# EAGLE board E4masda (EAGLE 7.6.0)
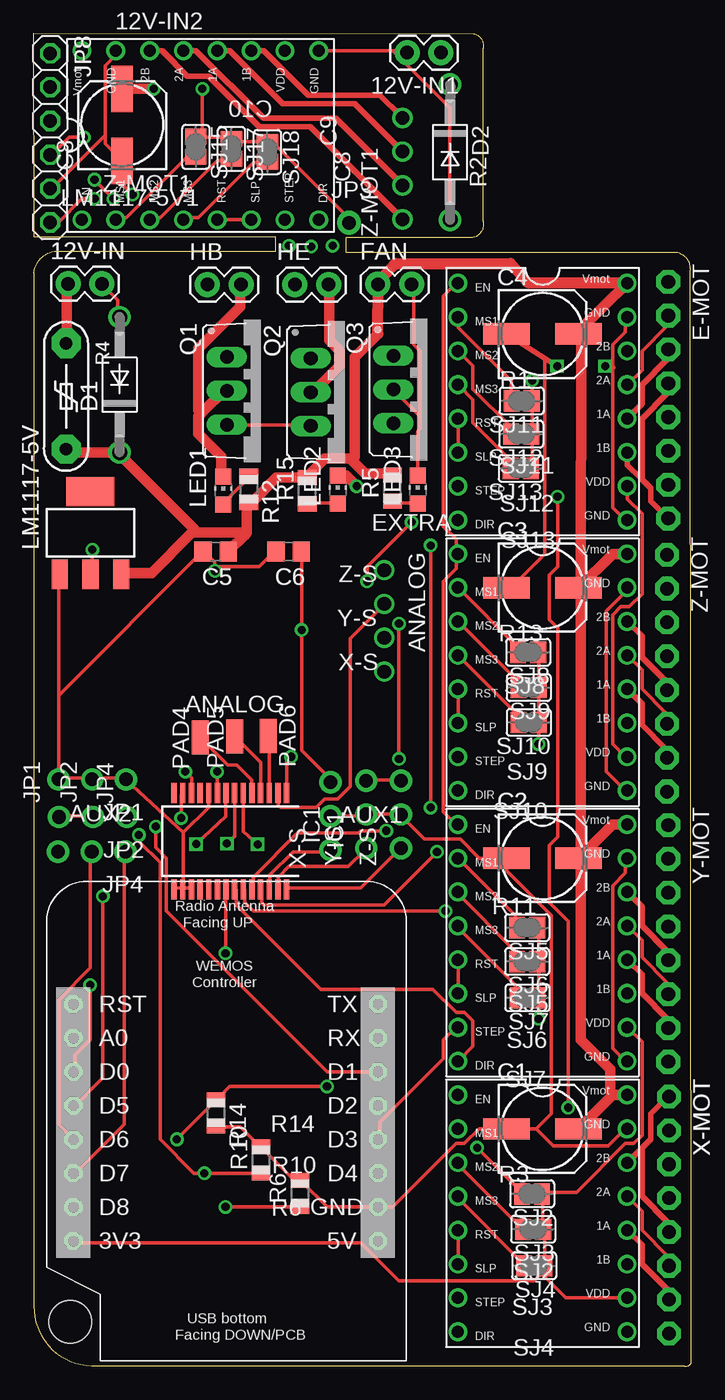
[diagram p0: board, top side]
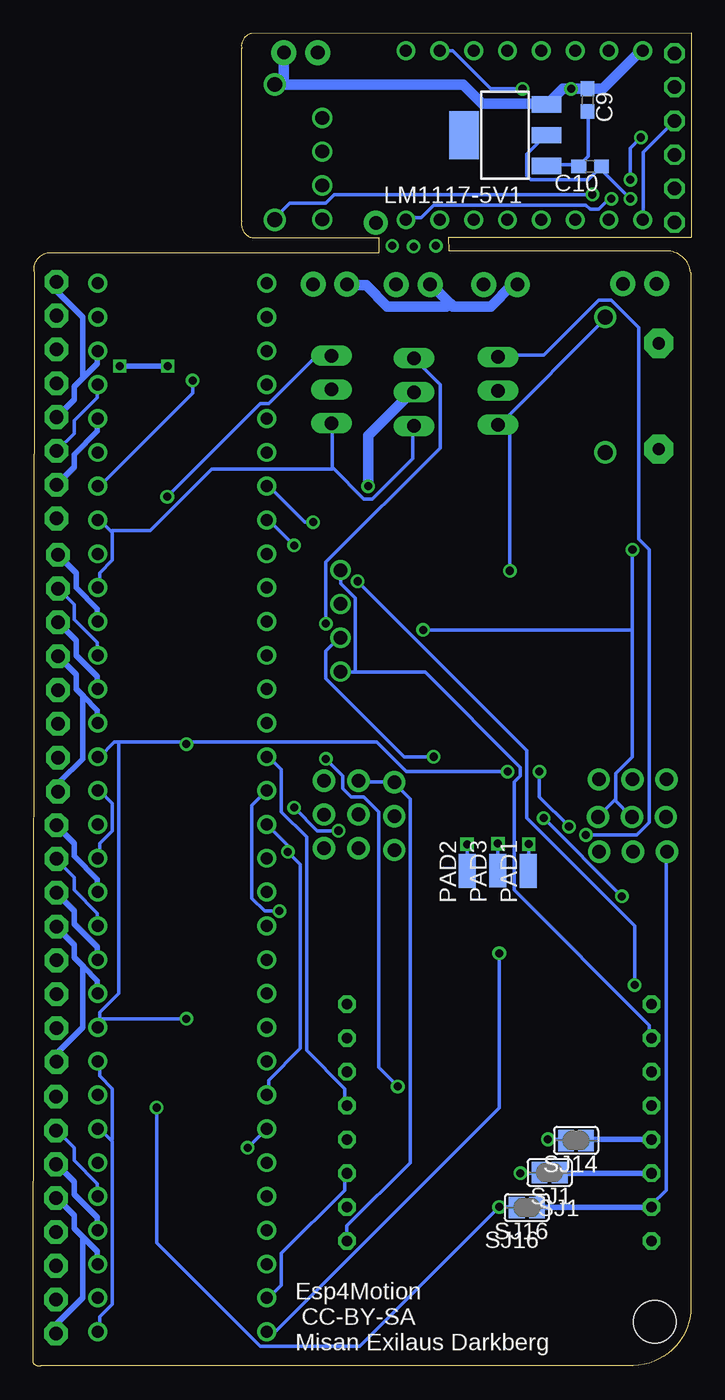
[diagram p1: board, bottom side, seen from below]

Size 49.41 x 100.11 mm. Coordinates in mm from the lower left corner, seen from the top.
Outline: 0,100.11 0.03,84.78 18.22,84.8 18.19,83.74 2.07,83.74 arc90 0.05,82.12 0.05,4.52 arc90 4.37,0.05 48.77,0.05 arc90 49.41,0.26 49.31,82.16 arc90 48.37,83.61 23.47,83.61 23.47,84.75 32.98,84.75 arc90 33.77,85.98 33.77,98.98 arc90 33.05,100.08 0.02,100.1
Copper layers (1*16): Top 0.035mm / dielectric 1.5mm / Bottom 0.035mm
Design rules "default *": minimum track width 10mil, minimum drill 24mil, track to track 8mil, track to pad 8mil, pad to pad 8mil, via to via 8mil, smd to smd 8mil, copper to edge 40mil, drill to drill 8mil, minimum pad ring 10mil, minimum via ring 8mil, stop-mask expansion 4mil, vias tented up to drill 0mil, thermal gap 10mil
Net classes: 1 Power: width 0.8 mm; 2 line: width 0.4 mm; 3 aux: width 0.2 mm
Holes 3.2 mm at 2.77,3.35

## Footprints (pad centres in the part's own frame; a part is rotated, then mirrored left to right if it is on the bottom)
1X02 = drill 1.016 pad 1.88: 1 0,0; 2 2.54,0
1X04 = drill 1.016: 1 -2.54,0; 2 0,0; 3 2.54,0; 4 5.08,0
153CLV-0605 = smd 3.5 x 1.6: + 2.7,0; - -2.7,0
C0805 = smd 1.3 x 1.5: 1 -0.95,0; 2 0.95,0
C0603 = smd 1.1 x 1: 1 -0.85,0; 2 0.85,0
DO41-10 = drill 1.118: A 5.08,0; C -5.08,0
1X08-CLEANBIG = drill 1.016 pad 1.778 octagon: 1 -8.89,0; 2 -6.35,0; 3 -3.81,0; 4 -1.27,0; 5 1.27,0; 6 3.81,0; 7 6.35,0; 8 8.89,0
SSOP28 = smd 0.4 x 1.5: 1 -4.225,-3.625; 2 -3.575,-3.625; 3 -2.925,-3.625; 4 -2.275,-3.625; 5 -1.625,-3.625; 6 -0.975,-3.625; 7 -0.325,-3.625; 8 0.325,-3.625; 9 0.975,-3.625; 10 1.625,-3.625; 11 2.275,-3.625; 12 2.925,-3.625; 13 3.575,-3.625; 14 4.225,-3.625; 15 4.225,3.625; 16 3.575,3.625; 17 2.925,3.625; 18 2.275,3.625; 19 1.625,3.625; 20 0.975,3.625; 21 0.325,3.625; 22 -0.325,3.625; 23 -0.975,3.625; 24 -1.625,3.625; 25 -2.275,3.625; 26 -2.925,3.625; 27 -3.575,3.625; 28 -4.225,3.625
1X03-CLEANBIG = drill 1.016 pad 1.676: 1 -2.54,0; 2 0,0; 3 2.54,0
1X01-CLEANBIG = drill 1.016 pad 1.778: 1 0,0
1X06 = drill 1.016 octagon: 1 -6.35,0; 2 -3.81,0; 3 -1.27,0; 4 1.27,0; 5 3.81,0; 6 6.35,0
CHIP-LED0805 = smd 1.2 x 1.2: A 0,-1.05; C 0,1.05
SOT223 = smd 1.219 x 2.235: 1 -2.311,-3.099; 2 0,-3.099; 3 2.311,-3.099 | smd 3.6 x 2.2: TAB 0,3.099
SMD1,27-2,54 = smd 1.27 x 2.54: 1 0,0
TO220BV = drill 1.016 long: D 0,-2.54; G -2.54,-2.54; S 2.54,-2.54
PF-8.0 = drill 0.914 pad 2.184 octagon: 1 -3.969,0; 2 3.969,0
R0805 = smd 1.1 x 1.4: 1 -1,0; 2 1,0
SJ = smd 1.168 x 1.6: 1 -0.762,0; 2 0.762,0
A4988BREAKOUT = drill 0.9: 1A 8.89,1.27; 1B 11.43,1.27; 2A 6.35,1.27; 2B 3.81,1.27; DIR 16.51,-11.43; EN -1.27,-11.43; GND 16.51,1.27; GND@0 1.27,1.27; MS1 1.27,-11.43; MS2 3.81,-11.43; MS3 6.35,-11.43; RST 8.89,-11.43; SLP 11.43,-11.43; STEP 13.97,-11.43; VDD 13.97,1.27; VMOT -1.27,1.27
WEMOS = drill 0.8 octagon: 3V3 0,0; 5V 22.86,0; A0 0,15.24; D0 0,12.7; D1 22.86,12.7; D2 22.86,10.16; D3 22.86,7.62; D4 22.86,5.08; D5 0,10.16; D6 0,7.62; D7 0,5.08; D8 0,2.54; GND 22.86,2.54; RST 0,17.78; RX 22.86,15.24; TX 22.86,17.78

## Placement (x,y rotation side)
12V-IN  [1X02]  2.61,81.29 0 top
12V-IN1  [1X02]  30.6,98.65 180 top
ANALOG  [1X04]  26.35,57.25 270 top
C1  100uf  [153CLV-0605]  38.23,17.83 0 top
C2  100uf  [153CLV-0605]  38.23,38.15 0 top
C3  100uf  [153CLV-0605]  38.23,58.47 0 top
C4  100uf  [153CLV-0605]  38.23,77.52 0 top
C5  10uf  [C0805]  13.69,61.18 180 top
C6  100uf  [C0805]  19.17,61.18 180 top
C8  100uf  [153CLV-0605]  6.67,93.21 90 top
C9  10uf  [C0603]  7.8,95.09 270 bottom
C10  100uf  [C0603]  7.62,90.11 180 bottom
D1  1N4004  [DO41-10]  6.48,73.71 90 top
D2  1N4004  [DO41-10]  31.29,91.18 270 top
E-MOT  [1X08-CLEANBIG]  47.67,72.55 270 top
FAN  [1X02]  25.87,81.25 0 top
HB  [1X02]  13.07,81.23 0 top
HE  [1X02]  19.63,81.23 0 top
IC1  MCP23017SS  [SSOP28]  14.79,39.43 180 top
JP1  [1X03-CLEANBIG]  4.42,44.07 180 top
JP2  [1X03-CLEANBIG]  4.47,41.25 180 top
JP3  [1X01-CLEANBIG]  23.7,85.88 0 top
JP4  [1X03-CLEANBIG]  4.39,38.65 180 top
JP8  [1X06]  1.27,92.25 270 top
LED1  [CHIP-LED0805]  14.27,65.75 0 top
LED2  [CHIP-LED0805]  22.87,65.85 0 top
LED3  [CHIP-LED0805]  28.87,65.85 0 top
LM1117-5V  LM1117IMPX-ADJ  [SOT223]  4.29,62.58 0 top
LM1117-5V1  LM1117IMPX-ADJ  [SOT223]  13.99,92.45 90 bottom
PAD1  WIREPADSMD1,27-254  [SMD1,27-2,54]  12.27,37.19 0 bottom
PAD2  WIREPADSMD1,27-254  [SMD1,27-2,54]  16.84,37.19 0 bottom
PAD3  WIREPADSMD1,27-254  [SMD1,27-2,54]  14.55,37.21 0 bottom
PAD4  WIREPADSMD1,27-254  [SMD1,27-2,54]  12.52,47.22 0 top
PAD5  WIREPADSMD1,27-254  [SMD1,27-2,54]  15.11,47.3 0 top
PAD6  WIREPADSMD1,27-254  [SMD1,27-2,54]  17.65,47.32 180 top
Q1  IRL540  [TO220BV]  17.07,73.25 270 top
Q2  IRL540  [TO220BV]  23.37,73.15 270 top
Q3  IRL540  [TO220BV]  29.57,73.35 270 top
R4  11  [PF-8.0]  2.46,72.85 270 top
R5  22R  [R0805]  26.97,65.95 90 top
R6  10k  [R0805]  20.03,12.98 90 top
R10  10k  [R0805]  17.11,15.5 90 top
R12  22R  [R0805]  16.17,65.85 270 top
R14  10k  [R0805]  13.71,19.02 270 top
R15  22R  [R0805]  20.57,65.75 90 top
SJ1  [SJ]  10.65,14.54 180 bottom
SJ2  [SJ]  37.44,12.94 180 top
SJ3  [SJ]  37.52,10.29 180 top
SJ4  [SJ]  37.6,7.54 180 top
SJ5  [SJ]  37.07,32.93 180 top
SJ6  [SJ]  37.07,30.39 180 top
SJ7  [SJ]  37.1,27.66 180 top
SJ8  [SJ]  37.15,53.62 180 top
SJ9  [SJ]  37.2,50.97 180 top
SJ10  [SJ]  37.2,48.35 180 top
SJ11  [SJ]  36.66,72.49 180 top
SJ12  [SJ]  36.63,70 180 top
SJ13  [SJ]  36.6,67.43 180 top
SJ14  [SJ]  8.67,16.95 180 bottom
SJ15  [SJ]  12.2,91.58 270 top
SJ16  [SJ]  12.36,11.91 180 bottom
SJ17  [SJ]  14.87,91.42 270 top
SJ18  [SJ]  17.58,91.19 270 top
U$1  A4988BREAKOUT  [A4988BREAKOUT]  43.31,19.1 270 top
U$2  A4988BREAKOUT  [A4988BREAKOUT]  43.31,80.06 270 top
U$3  A4988BREAKOUT  [A4988BREAKOUT]  43.31,39.42 270 top
U$5  WEMOS  [WEMOS]  3.01,9.41 0 top
U$6  A4988BREAKOUT  [A4988BREAKOUT]  4.92,97.52 0 top
U$9  A4988BREAKOUT  [A4988BREAKOUT]  43.31,59.74 270 top
X-MOT  [1X08-CLEANBIG]  47.72,11.35 270 top
X-S  [1X03-CLEANBIG]  22.31,41.31 90 top
Y-MOT  [1X08-CLEANBIG]  47.67,31.75 270 top
Y-S  [1X03-CLEANBIG]  24.99,41.44 90 top
Z-MOT  [1X08-CLEANBIG]  47.57,52.05 270 top
Z-MOT1  [1X04]  27.72,88.67 90 top
Z-S  [1X03-CLEANBIG]  27.6,41.44 90 top

## Library data of the parts
12V-IN 12V-IN1 FAN HB HE = SparkFun
ANALOG LED1-LED3 U$1-U$3 U$6 U$9 Z-MOT1 = RepRapjr
C1-C4 C8 = resistor
C5 C6 C9 C10 = eagle-ltspice; SPICEMODEL: NONE; SPICEPREFIX: C
D1 D2 = diode
E-MOT IC1 JP1-JP4 JP8 R5 R6 R10 R12 R14 R15 X-MOT X-S Y-MOT Y-S Z-MOT Z-S = adafruit
LM1117-5V LM1117-5V1 = lm1117
PAD1-PAD6 = wirepad
Q1-Q3 = smootietransistor-power
R4 = polyswitch
SJ1-SJ18 = jumper
U$5 = 1455413453956-wemos

## Nets
3V3: IC1.9 SJ2.1 SJ3.1 SJ4.1 SJ5.1 SJ6.1 SJ7.1 SJ8.1 SJ9.1 SJ10.1 SJ11.1 SJ12.1 SJ13.1 U$1.VDD U$2.VDD U$3.VDD U$5.3V3 U$9.VDD
3V31: JP3.1 SJ15.1 SJ17.1 SJ18.1 U$6.VDD
5V: C6.1 JP2.1 JP2.2 JP2.3 LM1117-5V.2 U$5.5V X-S.3 Y-S.3 Z-S.3
5V1: C10.1 JP8.6 LM1117-5V1.2
12V [Power]: C1.+ C2.+ C3.+ C4.+ C5.1 D1.C FAN.1 HB.1 HE.1 LM1117-5V.3 R4.2 R5.2 R12.2 R15.2 U$1.VMOT U$2.VMOT U$3.VMOT U$9.VMOT
12V1 [Power]: 12V-IN1.1 C8.+ C9.1 D2.C LM1117-5V1.3 U$6.VMOT
ANALOG: ANALOG.1 ANALOG.4 U$5.A0
AUX2 [aux]: IC1.8 PAD1.1
E-DIR: IC1.24 U$2.DIR
E-STEP: U$2.STEP U$5.D0
ENABLE: IC1.25 U$1.EN U$2.EN U$3.EN U$9.EN
ENABLE1: JP8.3 U$6.EN
FAN: JP4.3 SJ16.1 U$5.D8
GND: 12V-IN.2 C1.- C2.- C3.- C4.- C5.2 C6.2 D1.A IC1.10 IC1.15 IC1.16 IC1.17 JP1.1 JP1.2 JP1.3 LM1117-5V.1 Q1.S Q2.S Q3.S R6.2 R10.2 R14.2 U$1.GND U$1.GND@0 U$2.GND U$2.GND@0 U$3.GND U$3.GND@0 U$5.GND U$9.GND U$9.GND@0 X-S.2 Y-S.2 Z-S.2
GND1: 12V-IN1.2 C8.- D2.A JP8.5 U$6.GND U$6.GND@0
HB0: JP4.1 SJ1.1 U$5.D7
HE0: JP4.2 SJ14.1 U$5.D6
N$1: LED3.A R5.1
N$3 [aux]: IC1.7 PAD3.1
N$4: SJ12.2 U$2.MS2
N$5: U$2.RST U$2.SLP
N$6: SJ13.2 U$2.MS3
N$7: SJ11.2 U$2.MS1
N$8 [line]: U$3.1B Y-MOT.4 Y-MOT.8
N$9 [line]: U$3.1A Y-MOT.3 Y-MOT.7
N$10: U$3.2A Y-MOT.2 Y-MOT.6
N$11 [line]: U$3.2B Y-MOT.1 Y-MOT.5
N$12 [line]: U$1.1B X-MOT.4 X-MOT.8
N$13 [Power]: HB.2 LED1.C Q1.D
N$14 [line]: U$1.1A X-MOT.3 X-MOT.7
N$15: U$1.2A X-MOT.2 X-MOT.6
N$16 [line]: U$1.2B X-MOT.1 X-MOT.5
N$17 [line]: U$9.1B Z-MOT.4 Z-MOT.8
N$18: FAN.2 LED3.C Q3.D
N$19 [aux]: IC1.3 PAD6.1
N$20 [line]: U$9.1A Z-MOT.3 Z-MOT.7
N$21 [aux]: IC1.6 PAD2.1
N$22 [aux]: IC1.5 PAD4.1
N$23: Q2.G R14.1 SJ14.2
N$24: SJ3.2 U$1.MS2
N$25: U$9.RST U$9.SLP
N$26 [aux]: IC1.4 PAD5.1
N$27: Q3.G R6.1 SJ16.2
N$28: U$3.RST U$3.SLP
N$29: U$1.RST U$1.SLP
N$30 [Power]: 12V-IN.1 R4.1
N$34: SJ4.2 U$1.MS3
N$35: SJ2.2 U$1.MS1
N$37: SJ17.2 U$6.MS2
N$39: SJ18.2 U$6.MS3
N$40: SJ15.2 U$6.MS1
N$41 [line]: U$6.2B Z-MOT1.1
N$42 [line]: U$6.2A Z-MOT1.2
N$43 [line]: U$6.1A Z-MOT1.3
N$44 [line]: U$6.1B Z-MOT1.4
N$45: U$6.RST U$6.SLP
N$46: U$9.2A Z-MOT.2 Z-MOT.6
N$48 [line]: U$9.2B Z-MOT.1 Z-MOT.5
N$49: C9.2 C10.2 LM1117-5V1.1
N$50 [line]: E-MOT.4 E-MOT.8 U$2.1B
N$51 [line]: E-MOT.3 E-MOT.7 U$2.1A
N$54: LED1.A R12.1
N$55: E-MOT.2 E-MOT.6 U$2.2A
N$56: SJ6.2 U$3.MS2
N$57 [Power]: HE.2 LED2.C Q2.D
N$58: SJ7.2 U$3.MS3
N$59: SJ5.2 U$3.MS1
N$60 [line]: E-MOT.1 E-MOT.5 U$2.2B
N$64: SJ9.2 U$9.MS2
N$65: LED2.A R15.1
N$66: SJ10.2 U$9.MS3
N$67: SJ8.2 U$9.MS1
N$S4: Q1.G R10.1 SJ1.2
S-A0: ANALOG.3 IC1.1
S-A1: ANALOG.2 IC1.2
SCL: IC1.12 U$5.D1
SDA: IC1.13 U$5.D5
X-DIR: IC1.21 U$1.DIR
X-STEP: U$1.STEP U$5.D4
X-STOP: IC1.26 X-S.1
Y-DIR: IC1.22 U$3.DIR
Y-STEP: U$3.STEP U$5.D3
Y-STOP: IC1.27 Y-S.1
Z-DIR: IC1.23 U$9.DIR
Z-DIR1: JP8.4 U$6.DIR
Z-STEP: U$5.D2 U$9.STEP
Z-STEP1: U$6.STEP
Z-STOP: IC1.28 Z-S.1

## Tracks (layer width: path | path; a pad name or v marks a point on that pad's centre or on a via)
3V3  (via drill 0.61)
  Top 0.254: 44.42,5.05 U$1.VDD 39.99,5.13 38.25,6.88 SJ4.1 | SJ4.1 38.4,7.67 38.4,10.21 SJ3.1 38.25,10.37 38.25,12.91 SJ2.1 38.25,13.07 40.79,13.07 44.44,16.72 45.07,16.72 45.71,17.36 45.71,24.34 44.6,25.45 U$3.VDD | U$5.3V3 3.16,9.26 24.59,9.26 27.45,6.4 37.61,6.4 38.25,7.04 38.25,7.51 SJ4.1 | SJ8.1 37.93,53.55 37.93,51.01 SJ9.1 37.93,50.85 37.93,48.47 SJ10.1 37.93,48.31 v37.93,46.72 | SJ5.1 37.93,32.91 37.93,30.53 SJ6.1 37.93,30.37 37.93,27.67 SJ7.1 37.93,27.52 v37.93,26.09 | SJ13.1 37.45,67.52 37.45,69.9 SJ12.1 37.45,70.06 37.45,72.44 SJ11.1 37.45,72.6 v37.45,74.03 | v13.8,44.66 13.8,43.07 IC1.9 | U$2.VDD 44.6,66.09 44.6,65.14 45.71,64.03 45.71,58 44.75,57.04 44.12,57.04 43.48,56.41 43.48,46.72 44.44,45.77 U$9.VDD
  Bottom 0.254: v13.8,44.66 21.42,44.66 23.64,46.88 37.93,46.88 | 43.01,46.88 43.33,46.88 44.44,45.77 U$9.VDD | 43.01,46.88 37.93,46.88 | 44.44,26.09 44.44,26.56 43.01,27.99 43.01,46.88 | 44.44,26.09 44.44,25.45 U$3.VDD 44.44,26.09 | v37.45,74.03 37.45,73.08 44.44,66.09 U$2.VDD | 44.44,26.09 v37.93,26.09 | 37.93,46.88 v37.93,46.72
3V31  (via drill 0.61)
  Top 0.254: 12.69,92.29 14.75,92.29 SJ17.1 14.91,92.13 15.07,91.97 17.45,91.97 SJ18.1 17.61,91.81 18.08,91.81 23.64,86.25 23.64,85.94 JP3.1 | 12.69,92.29 12.21,92.29 SJ15.1 12.69,92.29 | 12.69,92.29 v12.69,95.94
  Bottom 0.254: v12.69,95.94 15.07,95.94 17.93,98.79 18.88,98.79 U$6.VDD
5V  (via drill 0.61)
  Top 0.254: v4.43,61.33 4.43,59.58 LM1117-5V.2 | JP2.3 2.05,41.33 4.43,41.33 JP2.2 | Z-S.3 27.45,44.03 25.07,44.03 Y-S.3 | C6.1 20.15,61.17 v20.15,55.3 20.15,46.25 22.21,44.18 22.21,43.87 X-S.3
  Bottom 0.254: 4.43,55.3 4.43,45.77 5.7,44.5 5.7,42.6 | 4.43,55.3 v4.43,61.33 | 5.7,42.6 5.7,42.44 4.59,41.33 JP2.2 | 5.7,42.6 6.97,41.33 JP2.1 | U$5.5V 25.86,10.53 21.1,15.29 21.1,42.6 22.21,43.71 X-S.3 22.37,43.87 24.91,43.87 Y-S.3 | v20.15,55.3 4.43,55.3
5V1  (via drill 0.61)
  Top 0.254: v4.59,87.68 3.64,87.68 1.89,85.94 1.42,85.94 JP8.6
  Bottom 0.254: LM1117-5V1.2 10.94,92.44 12.37,91.02 12.37,89.43 12.05,89.11 7.77,89.11 6.81,90.06 C10.1 6.81,89.9 v4.59,87.68
12V
  Top 0.8: R4.2 2.53,68.79 2.69,68.63 6.34,68.63 D1.C 6.65,68.31 12.05,62.92 11.89,62.6 | 15.78,62.36 14.75,61.33 C5.1 | 15.78,62.36 16.02,62.6 16.02,64.82 R12.2 16.5,64.98 18.24,66.73 20.47,66.73 R15.2 20.78,67.04 21.89,68.16 23.8,68.16 23.88,68.08 | 23.88,68.08 24.91,67.04 26.82,67.04 R5.2 | 11.89,62.6 8.88,59.58 6.65,59.58 LM1117-5V.3 | 11.89,62.6 15.54,62.6 15.78,62.36 | FAN.1 25.86,81.17 25.86,77.52 24.12,75.78 24.12,68.31 23.88,68.08 | U$2.VMOT 44.44,81.33 44.44,81.01 44.64,81.37 40.84,77.65 C4.+ 41.15,76.92 41.1,59.11 C3.+ | U$9.VMOT 43.48,61.01 40.94,58.47 C3.+ | 43.48,20.37 U$1.VMOT | 43.48,20.37 40.94,17.83 C1.+ | U$3.VMOT 43.48,40.69 40.94,38.15 C2.+ | 43.48,20.37 43.33,20.69 43.33,22.28 41.1,24.5 41.1,37.83 C2.+ | C3.+ 41.1,58.15 41.1,38.79 C2.+
  Top 0.813: 25.86,77.52 25.91,81.36 27.18,82.8 35.81,82.8 37.11,81.38 44.64,81.37
  Bottom 0.8: 18.16,79.82 19.51,81.17 HE.1 | 18.16,79.82 17.93,79.59 15.07,79.59 13.48,81.17 13.16,81.17 HB.1 | FAN.1 25.86,81.17 24.43,81.17 22.85,79.59 18.4,79.59 18.16,79.82
12V1  (via drill 0.61)
  Top 0.8: v9.04,95.94 6.81,95.94 C8.+
  Bottom 0.8: 7.92,95.94 v9.04,95.94 9.67,95.94 10.78,94.83 LM1117-5V1.3 11.26,94.83 15.7,94.83 17.13,96.25 31.26,96.25 D2.C 30.63,96.57 30.63,98.64 12V-IN1.1 | 7.92,95.94 6.65,95.94 4.11,98.48 U$6.VMOT | 7.92,95.94 C9.1
ANALOG
  Bottom 0.254: 25.23,52.12 26.34,52.12 ANALOG.4 | 25.23,52.12 19.99,52.12 12.85,44.98 12.85,44.34 13.32,43.87 13.32,35.77 3.16,25.61 3.16,24.66 U$5.A0 | 25.23,52.12 25.23,57.68 26.34,58.79 26.34,59.74 ANALOG.1
AUX2  (via drill 0.6)
  Top 0.254: IC1.8 14.47,41.29 v12.22,39.22
  Bottom 0.254: v12.22,39.22 12.24,37.21 PAD1.1
E-DIR  (via drill 0.61)
  Top 0.254: v26.5,40.22 24.59,40.22 24.43,40.06 19.83,40.06 16.5,36.72 16.5,35.93 IC1.24 | v29.83,61.65 v29.83,41.96
  Bottom 0.254: v26.5,40.22 28.09,40.22 v29.83,41.96 | v29.83,61.65 31.74,63.55 U$2.DIR
E-STEP  (via drill 0.61)
  Top 0.254: v4.27,28.63 4.27,24.5 3.16,23.39 3.16,22.12 U$5.D0 | v25.07,58.95 25.07,60.06 v28.4,63.39
  Bottom 0.254: v4.27,28.63 4.27,33.07 12.37,41.17 12.37,46.25 v25.07,58.95 | v28.4,63.39 29.04,63.39 31.74,66.09 U$2.STEP
ENABLE  (via drill 0.61)
  Top 0.254: 31.74,61.01 31.74,62.12 30.78,63.08 30.78,80.38 31.74,81.33 U$2.EN | v30.31,38.63 26.34,34.66 17.29,34.66 17.13,34.82 17.13,35.77 IC1.25 | 31.74,61.01 31.74,59.9 30.78,58.95 30.78,41.64 31.74,40.69 U$3.EN | 31.74,61.01 U$9.EN
  Bottom 0.254: U$3.EN 31.9,40.69 30.31,39.1 v30.31,38.63 29.36,37.68 29.36,23.86 31.74,21.48 31.74,20.37 U$1.EN
ENABLE1
  Bottom 0.254: U$6.EN 3.64,86.25 3.64,91.17 1.42,93.4 JP8.3
FAN
  Bottom 0.254: JP4.3 1.89,38.63 1.89,13.23 3,12.12 U$5.D8
  Bottom 0.406: U$5.D8 11.56,11.95 SJ16.1
GND  (via drill 0.6, 0.61)
  Top 0.254: 44.67,2.8 U$1.GND | IC1.15 10.62,35.93 11.1,35.93 IC1.16 11.26,35.93 | 11.26,35.93 11.73,35.93 IC1.17 | 11.26,40.09 11.26,39.58 11.26,35.93 | 11.26,40.09 13.19,41.97 13.16,42.91 IC1.10 | 13.72,60.14 13.8,60.06 16.97,60.06 18.08,61.17 C6.2 | 13.72,60.14 13.64,60.22 13.64,60.38 12.85,61.17 C5.2 12.69,61.17 1.89,50.38 | 1.89,44.18 1.89,50.38 | 1.89,50.38 1.89,59.42 LM1117-5V.1 | 1.89,44.18 4.27,44.18 JP1.2 4.43,44.18 6.81,44.18 JP1.1 6.97,44.03 11.26,40.09 | 1.89,44.18 JP1.3 | D1.A 6.34,78.79 6.34,80.06 5.23,81.17 12V-IN.2 | Q1.S 14.59,70.7 20.78,70.7 Q2.S | U$2.GND@0 44.44,78.79 44.44,77.68 43.48,76.73 43.48,75.01 43.48,64.5 44.44,63.55 U$2.GND | X-S.2 22.37,41.33 24.91,41.33 Y-S.2 25.07,41.49 27.45,41.49 Z-S.2 27.61,41.33 29.36,39.58 32.05,39.58 33.48,38.15 C2.- 35.55,38.15 35.55,37.2 38.88,33.87 38.88,18.94 37.77,17.83 | R14.2 13.8,17.99 15.54,17.99 16.97,16.56 R10.2 17.13,16.4 19.51,14.02 19.99,14.02 R6.2 20.15,13.86 22.05,11.96 U$5.GND 26.02,11.96 26.97,11.96 31.74,16.72 32.37,16.72 33.48,17.83 C1.- 37.77,17.83 | 37.77,17.83 39.04,16.56 43.17,16.56 44.44,17.83 U$1.GND@0 | U$3.GND@0 44.44,38.15 44.44,37.04 43.48,36.09 43.48,23.86 44.44,22.91 U$3.GND | U$9.GND@0 44.44,58.47 44.44,58.15 43.01,56.73 43.01,44.66 44.44,43.23 U$9.GND | v13.64,59.74 13.64,60.06 13.72,60.14 | C3.- 35.86,58.47 38.4,61.01 38.4,75.62 38.44,75.67
  Top 0.406: C4.- 38.44,75.67 v39.32,75.11 | v42.93,75.11 43.48,75.01
  Bottom 0.254: 26.9,67.44 24.59,65.14 23.96,65.14 20.94,68.16 20.94,70.54 Q2.S | 26.9,67.44 26.97,67.52 26.97,70.7 Q3.S | D1.A 6.5,78.63 14.43,70.7 Q1.S 13.64,71.33 v13.64,59.74 | 43.56,62.68 44.44,63.55 U$2.GND | 43.56,62.68 43.48,62.6 43.48,60.54 44.44,59.58 44.44,58.47 U$9.GND@0 | U$3.GND@0 44.44,38.15 44.44,39.26 43.48,40.22 43.48,42.28 44.44,43.23 U$9.GND | 43.56,16.96 44.44,17.83 U$1.GND@0 | 43.56,16.96 43.48,16.88 43.48,4.66 44.44,3.7 44.44,2.59 U$1.GND | U$3.GND 44.44,22.91 44.44,21.8 43.48,20.85 43.48,17.04 43.56,16.96 | 26.9,67.44 26.97,67.36 36.02,67.36 40.63,62.76 43.48,62.76 43.56,62.68
  Bottom 0.406: v39.32,75.11 v42.93,75.11
GND1  (via drill 0.61)
  Top 0.254: 5.38,92.44 5.38,91.81 6.65,90.54 C8.- 6.81,90.38 6.81,88.63 v7.45,88 | 5.38,92.44 5.38,97.68 6.18,98.48 6.18,98.79 U$6.GND@0 | 5.38,92.44 1.42,88.48 JP8.5 | 26.97,98.79 27.93,98.79 12V-IN1.2 | 26.97,98.79 21.58,98.79 U$6.GND | 26.97,98.79 31.26,94.51 31.26,86.25 D2.A
  Bottom 0.254: v7.45,88 26.82,88 27.45,87.36 30.15,87.36 31.26,86.25 D2.A
HB0
  Top 0.254: JP4.1 6.81,38.63 6.81,18.15 3.16,14.5 U$5.D7
  Bottom 0.406: U$5.D7 9.84,14.49 SJ1.1
HE0
  Top 0.254: U$5.D6 1.89,18.15 1.89,27.52 4.27,29.9 4.27,38.63 JP4.2
  Bottom 0.406: U$5.D6 7.83,17.03 SJ14.1
N$1
  Top 0.254: LED3.A 28.72,64.82 26.97,64.82 R5.1
N$3  (via drill 0.6)
  Top 0.254: IC1.7 15.12,39.78 v14.53,39.24
  Bottom 0.254: v14.53,39.24 14.53,37.24 PAD3.1
N$4
  Top 0.254: SJ12.2 35.86,70.06 35.86,70.54 33.01,73.39 33.01,75.14 31.9,76.25 U$2.MS2
N$5
  Top 0.254: U$2.SLP 31.9,68.63 31.9,71.17 U$2.RST
N$6
  Top 0.254: SJ13.2 35.71,67.52 35.71,68.16 33.01,70.85 33.01,72.6 31.9,73.71 U$2.MS3
N$7
  Top 0.254: SJ11.2 35.86,72.6 35.86,74.03 31.9,78 31.9,78.79 U$2.MS1
N$8
  Bottom 0.4: 45.63,29.98 46.34,30.69 46.34,31.64 47.61,32.91 Y-MOT.4 | 45.63,29.98 44.6,28.94 44.6,27.99 U$3.1B | Y-MOT.8 47.61,22.91 47.61,23.55 45.71,25.45 45.71,29.9 45.63,29.98
N$9
  Top 0.4: Y-MOT.7 47.61,25.45 47.61,26.09 45.71,27.99 45.71,29.42 44.6,30.53 U$3.1A
  Bottom 0.4: U$3.1A 44.6,30.53 44.6,31.48 46.34,33.23 46.34,34.18 47.61,35.45 Y-MOT.3
N$10
  Top 0.254: Y-MOT.6 47.61,27.99 47.61,28.79 45.71,30.69 45.71,31.96 44.6,33.07 U$3.2A
  Bottom 0.254: U$3.2A 44.6,33.07 44.6,34.02 46.34,35.77 46.34,36.72 47.61,37.99 Y-MOT.2
N$11
  Top 0.4: Y-MOT.5 47.61,30.53 47.61,31.17 45.71,33.07 45.71,34.5 44.6,35.61 U$3.2B
  Bottom 0.4: U$3.2B 44.6,35.61 44.6,36.56 46.34,38.31 46.34,39.26 47.61,40.53 Y-MOT.1
N$12
  Bottom 0.4: 45.63,9.66 46.34,10.37 46.34,11.32 47.61,12.59 X-MOT.4 | 45.63,9.66 44.6,8.62 44.6,7.67 U$1.1B | X-MOT.8 47.61,2.59 47.61,3.23 45.71,5.13 45.71,9.58 45.63,9.66
N$13
  Top 0.8: 12.61,71.57 14.43,73.39 Q1.D | 12.61,71.57 12.37,71.33 12.37,70.06 14.12,68.31 14.12,66.89 LED1.C | HB.2 15.54,81.17 15.54,79.59 12.37,76.41 12.37,71.81 12.61,71.57
N$14
  Top 0.4: X-MOT.7 47.61,5.13 47.61,5.77 45.71,7.67 45.71,9.1 44.6,10.21 U$1.1A
  Bottom 0.4: U$1.1A 44.6,10.21 44.6,11.16 46.34,12.91 46.34,13.86 47.61,15.13 X-MOT.3
N$15
  Top 0.254: X-MOT.6 47.61,7.67 47.61,8.31 45.71,10.21 45.71,11.64 44.6,12.75 U$1.2A
  Bottom 0.254: U$1.2A 44.6,12.75 44.6,13.7 46.34,15.45 46.34,16.4 47.61,17.67 X-MOT.2
N$16
  Top 0.4: 45.63,16.32 46.34,17.04 46.34,18.94 47.61,20.21 X-MOT.1 | 45.63,16.32 44.6,15.29 U$1.2B | X-MOT.5 47.61,10.21 47.61,10.85 45.71,12.75 45.71,16.24 45.63,16.32
N$17
  Bottom 0.4: 45.63,50.3 46.18,50.85 46.18,51.96 47.45,53.23 Z-MOT.4 | 45.63,50.3 44.6,49.26 44.6,48.31 U$9.1B | Z-MOT.8 47.45,43.23 47.45,43.87 45.71,45.61 45.71,50.22 45.63,50.3
N$18
  Top 0.254: 28.96,71.41 27.13,73.24 Q3.D | 28.96,71.41 29.04,71.33 29.04,70.38 28.88,70.22 28.88,67.04 LED3.C | FAN.2 28.56,81.17 28.56,76.73 29.04,76.25 29.04,71.49 28.96,71.41
  Bottom 0.254: 28.47,81.2 FAN.2
N$19
  Top 0.254: PAD6.1 17.72,47.26 IC1.3
N$20
  Top 0.4: Z-MOT.7 47.45,45.77 47.45,46.41 45.71,48.15 45.71,49.74 44.6,50.85 U$9.1A
  Bottom 0.4: U$9.1A 44.6,50.85 44.6,51.8 46.18,53.39 46.18,54.5 47.45,55.77 Z-MOT.3
N$21  (via drill 0.6)
  Top 0.254: IC1.6 15.77,40.16 v16.84,39.19
  Bottom 0.254: v16.84,39.19 16.81,37.21 PAD2.1
N$22
  Top 0.254: IC1.5 16.41,44.02 15.29,45.14 14.6,45.14 PAD4.1
N$23  (via drill 0.61)
  Top 0.254: v10.78,17.04 13.64,19.9 R14.1 13.8,20.05 14.75,21.01 v22.05,21.01 | v27.45,45.61 v27.45,55.77
  Bottom 0.254: v10.78,17.04 9.51,17.04 SJ14.2 | v27.45,55.77 27.45,60.38 18.88,68.95 18.88,73.71 20.78,75.62 Q2.G | v27.45,45.61 26.18,44.34 26.18,43.39 25.55,42.76 24.59,42.76 23.48,41.64 23.48,22.44 v22.05,21.01
N$24
  Top 0.254: SJ3.2 36.66,10.37 31.74,15.29 U$1.MS2
N$25
  Top 0.254: U$9.SLP 31.9,48.31 31.9,50.85 U$9.RST
N$26
  Top 0.254: PAD5.1 17.07,45.34 IC1.4
N$27  (via drill 0.61)
  Top 0.254: v14.43,11.96 19.99,11.96 R6.1 | v39.36,65.3 39.36,60.06 38.72,59.42 38.72,56.09 39.36,55.46 39.36,39.74 38.72,39.1 38.72,34.82 40.15,33.39 v40.15,19.42
  Bottom 0.254: SJ16.2 13.16,11.96 v14.43,11.96 24.91,1.48 32.37,1.48 40.15,9.26 v40.15,19.42 | v39.36,65.3 32.37,72.28 31.74,72.28 28.24,75.78 27.13,75.78 Q3.G
N$28
  Top 0.254: U$3.SLP 31.9,27.99 31.9,30.53 U$3.RST
N$29
  Top 0.254: U$1.SLP 31.9,7.67 31.9,10.21 U$1.RST
N$30
  Top 0.8: 12V-IN.1 2.53,81.17 2.53,76.89 R4.1
N$31  (via drill 0.6)
  other vias: 19.2,84.14
N$32  (via drill 0.6)
  other vias: 20.87,84.09
N$33  (via drill 0.6)
  other vias: 22.47,84.14
N$34
  Top 0.254: SJ4.2 36.82,7.67 31.74,12.75 U$1.MS3
N$35  (via drill 0.61)
  Top 0.254: v33.32,16.4 36.66,13.07 SJ2.2
  Bottom 0.254: v33.32,16.4 31.9,17.83 U$1.MS1
N$37
  Top 0.254: SJ17.2 14.75,90.54 13.8,90.54 9.51,86.25 8.88,86.25 U$6.MS2
N$39
  Top 0.254: SJ18.2 17.45,90.38 16.5,90.38 12.37,86.25 11.42,86.25 U$6.MS3
N$40
  Top 0.254: SJ15.2 12.05,90.7 11.42,90.7 6.97,86.25 6.34,86.25 U$6.MS1
N$41
  Top 0.4: U$6.2B 8.88,98.79 9.67,98.79 11.58,96.89 13.16,96.89 16.97,93.08 20.78,93.08 27.61,86.25 Z-MOT1.1
N$42
  Top 0.4: U$6.2A 11.42,98.79 12.21,98.79 17.29,93.71 22.69,93.71 27.61,88.79 Z-MOT1.2
N$43
  Top 0.4: U$6.1A 13.96,98.79 14.75,98.79 18.72,94.83 24.12,94.83 27.61,91.33 Z-MOT1.3
N$44
  Top 0.4: U$6.1B 16.5,98.79 17.29,98.79 20.62,95.46 26.02,95.46 27.61,93.87 Z-MOT1.4
N$45
  Top 0.254: U$6.RST 13.96,86.09 U$6.SLP
N$46
  Top 0.254: Z-MOT.6 47.45,48.31 47.45,49.11 45.71,50.85 45.71,52.28 44.6,53.39 U$9.2A
  Bottom 0.254: U$9.2A 44.6,53.39 44.6,54.34 46.34,56.09 46.34,57.2 47.45,58.31 Z-MOT.2
N$48
  Top 0.4: Z-MOT.5 47.45,50.85 47.45,51.49 45.71,53.23 45.71,54.82 44.6,55.93 U$9.2B
  Bottom 0.4: U$9.2B 44.6,55.93 44.6,56.88 46.18,58.47 46.18,59.58 47.45,60.85 Z-MOT.1
N$49
  Bottom 0.254: C9.2 7.77,94.19 7.77,90.86 8.4,90.22 C10.2 8.56,90.22 10.78,90.22 LM1117-5V1.1
N$50
  Top 0.4: 45.63,66.65 46.34,65.93 46.34,64.98 47.61,63.71 E-MOT.8 | 45.63,66.65 44.6,67.68 44.6,68.63 U$2.1B | E-MOT.4 47.61,73.71 47.61,73.08 45.71,71.17 45.71,66.73 45.63,66.65
N$51
  Top 0.4: E-MOT.3 47.61,76.25 47.61,75.62 45.71,73.71 45.71,72.28 44.6,71.17 U$2.1A
  Bottom 0.4: U$2.1A 44.6,71.17 44.6,70.22 46.34,68.47 46.34,67.52 47.61,66.25 E-MOT.7
N$54
  Top 0.254: LED1.A 14.27,64.82 16.18,66.73 R12.1
N$55
  Top 0.254: E-MOT.2 47.61,78.79 47.61,78.16 45.71,76.25 45.71,74.82 44.6,73.71 U$2.2A
  Bottom 0.254: U$2.2A 44.6,73.71 44.6,72.76 46.34,71.01 46.34,70.06 47.61,68.79 E-MOT.6
N$56
  Top 0.254: SJ6.2 36.18,30.53 36.18,31.17 31.74,35.61 U$3.MS2
N$57  (via drill 0.61)
  Top 0.8: v24.28,66.09 23.48,66.89 23.01,66.89 LED2.C | HE.2 22.21,81.17 22.21,77.05 23.01,76.25 23.01,75.14 20.94,73.08 Q2.D
  Bottom 0.8: v24.28,66.09 24.28,69.9 20.94,73.24 Q2.D
N$58
  Top 0.254: SJ7.2 36.18,27.67 36.18,28.63 31.74,33.07 U$3.MS3
N$59
  Top 0.254: SJ5.2 36.18,33.07 36.18,33.87 31.9,38.15 U$3.MS1
N$60
  Bottom 0.4: 45.63,74.27 46.34,73.55 46.34,72.6 47.61,71.33 E-MOT.5 | 45.63,74.27 44.6,75.3 44.6,76.25 U$2.2B | E-MOT.1 47.61,81.33 47.61,80.7 45.71,78.79 45.71,74.35 45.63,74.27
N$64
  Top 0.254: SJ9.2 36.34,51.01 36.34,51.49 31.9,55.93 U$9.MS2
N$65
  Top 0.254: LED2.A 22.85,64.82 20.62,64.82 R15.1
N$66
  Top 0.254: SJ10.2 36.34,48.47 36.34,48.95 31.9,53.39 U$9.MS3
N$67
  Top 0.254: SJ8.2 36.34,53.71 36.34,54.03 31.9,58.47 U$9.MS1
N$S4  (via drill 0.61)
  Top 0.254: R10.1 16.97,14.5 v12.85,14.5 12.05,14.5 9.51,17.04 9.51,37.83 7.92,39.42 v7.92,39.9
  Bottom 0.254: v12.85,14.5 11.42,14.5 SJ1.2 | v7.92,39.9 4.11,39.9 3.16,40.85 3.16,61.33 3.96,62.12 3.96,78 6.02,80.06 6.97,80.06 11.1,75.93 14.43,75.93 Q1.G
S-A0  (via drill 0.61)
  Top 0.254: v19.35,45.77 19.04,45.45 19.04,43.07 IC1.1
  Bottom 0.254: v19.35,45.77 21.58,45.77 27.45,51.65 27.45,53.71 26.5,54.66 ANALOG.3
S-A1
  Top 0.254: IC1.2 18.4,42.91 18.4,42.12 18.56,41.96 21.26,41.96 21.89,42.6 22.85,42.6 23.8,43.55 23.8,54.66 26.34,57.2 ANALOG.2
SCL  (via drill 0.61)
  Top 0.254: v11.42,44.66 11.89,44.18 11.89,43.07 IC1.12 | v9.19,40.53 9.19,38.95 9.99,38.15 9.99,34.18 22.05,22.12 U$5.D1
  Bottom 0.254: v11.42,44.66 11.42,42.76 v9.19,40.53
SDA  (via drill 0.61)
  Top 0.254: v11.1,41.17 11.1,42.91 IC1.13 | v5.23,35.29 5.23,21.64 3.16,19.58 U$5.D5
  Bottom 0.254: v5.23,35.29 v11.1,41.17
X-DIR  (via drill 0.61)
  Top 0.254: v14.43,31.01 14.43,35.77 IC1.21
  Bottom 0.254: v14.43,31.01 14.43,19.42 31.26,2.59 U$1.DIR
X-STEP
  Bottom 0.254: U$5.D4 26.02,14.34 26.02,13.23 30.78,8.47 30.78,6.08 31.74,5.13 U$1.STEP
X-STOP
  Top 0.254: IC1.26 17.77,35.93 17.77,36.88 19.51,38.63 22.21,38.63 X-S.1
Y-DIR
  Top 0.254: IC1.22 15.23,35.77 15.23,34.66 21.58,28.31 29.99,28.31 31.74,26.56 32.37,26.56 33.01,25.93 33.01,24.02 31.9,22.91 U$3.DIR
Y-STEP
  Top 0.254: U$5.D3 26.02,17.04 26.02,18.31 30.78,23.07 30.78,24.5 31.74,25.45 U$3.STEP
Y-STOP
  Top 0.254: IC1.27 18.4,35.93 18.4,36.72 19.2,37.52 23.64,37.52 24.91,38.79 Y-S.1
Z-DIR  (via drill 0.61)
  Top 0.254: v30.94,34.18 16.5,34.18 15.86,34.82 15.86,35.77 IC1.23
  Bottom 0.254: v30.94,34.18 32.05,34.18 33.01,35.14 33.01,42.12 31.9,43.23 U$9.DIR
Z-DIR1  (via drill 0.61)
  Top 0.254: v4.59,89.11 v6.02,87.68 | v3.8,92.29 2.69,92.29 1.42,91.02 JP8.4
  Bottom 0.254: v6.02,87.68 6.18,87.68 6.97,86.89 7.61,86.89 7.92,87.21 19.35,87.21 20.31,86.25 21.42,86.25 U$6.DIR | v4.59,89.11 4.59,91.49 v3.8,92.29
Z-STEP
  Bottom 0.254: U$5.D2 26.02,19.58 26.02,20.85 28.88,23.71 28.88,39.74 30.78,41.64 30.78,44.82 31.74,45.77 U$9.STEP
Z-STOP
  Top 0.254: IC1.28 19.04,35.93 24.59,35.93 27.45,38.79 Z-S.1

## Text on the board
bPlace: Esp4Motion / CC-BY-SA / Misan Exilaus Darkberg
_tNames: JP8 | 12V-IN2 | C10 | C9 | R2 | C8 | Z-MOT1 | LM1117-5V1 | 12V-IN | HB | HE | FAN | C4 | Q1 | Q2 | Q3 | R4 | R1 | D1 | SJ11 | R12 | R15 | LED2 | R5 | LED3 | SJ12 | LED1 | EXTRA | SJ13 | C3 | LM1117-5V | C5 | C6 | Z-S | Y-S | R13 | X-S | SJ8 | ANALOG | SJ9 | JP1 | JP2 | JP4 | IC1 | C2 | SJ10 | AUX2 | AUX1 | R11 | SJ5 | SJ6 | SJ7 | X-MOT | C1 | R14 | R10 | R3 | R6 | SJ2 | SJ3 | SJ4
_bNames: SJ14 | SJ1 | SJ16